# Altium PCB prog.PcbDoc
Units mil, origin at the board's own origin, x right, y up, seen from the top; angles counter-clockwise.
Board outline 400 x 1145 mil, 2 copper layers (Top Layer, Bottom Layer); 2 components, 7 nets, 20 pads, 1 vias.
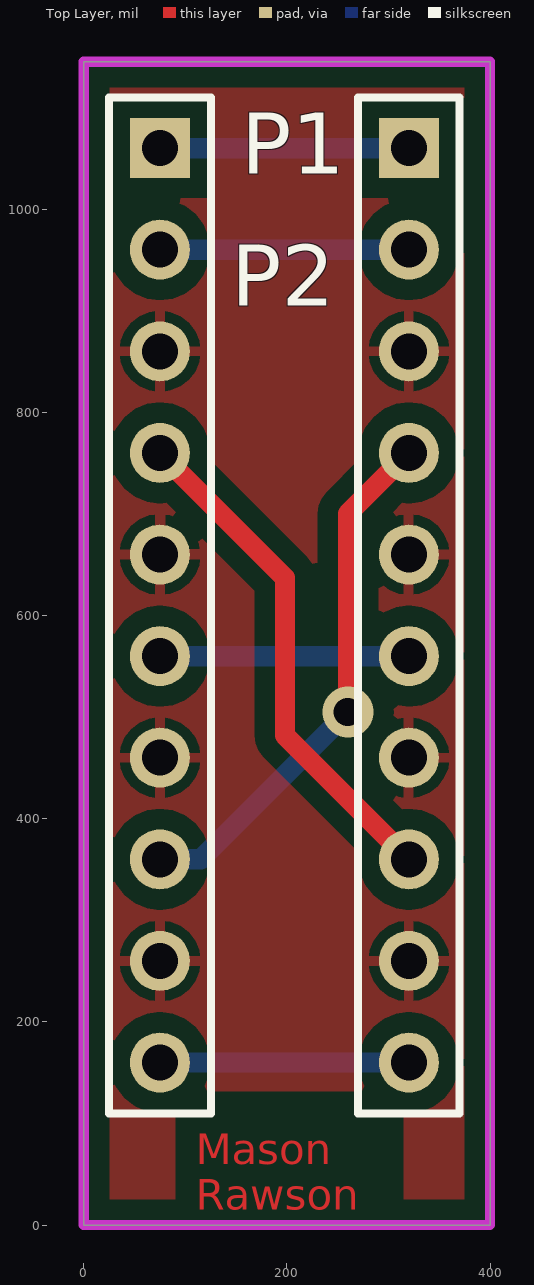
[diagram p0: Top Layer view]
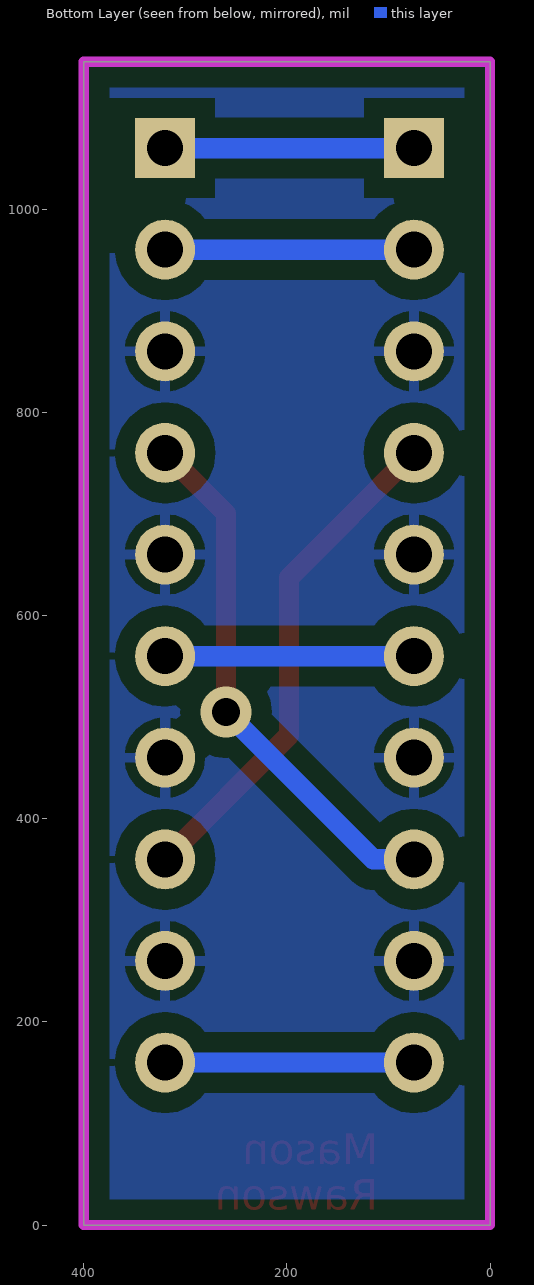
[diagram p1: Bottom Layer view, seen from below]

## Layer stack, top to bottom
Top Solder: solder mask 0.4, Solder Resist, Dk 3.5
Top Layer: signal copper 1.4
Dielectric 1: dielectric 12.6, FR-4, Dk 4.8
Bottom Layer: signal copper 1.4
Bottom Solder: solder mask 0.4, Solder Resist, Dk 3.5

## Board outline
0,0 0,1145 400,1145 400,0

## Design rules (kind name [scope] priority, off if disabled: settings)
Clearance [All] p1: gap=20
PolygonConnect [All] p1: connectstyle=Relief reliefconductorwidth=10 reliefentries=4 polygonreliefangle="90 Angle" airgapwidth=10
RoutingVias [All] p1: holewidth=28 width=50 viastyle="Through Hole" minholewidth=28 minwidth=50 maxholewidth=28 maxwidth=50
SolderMaskExpansion [All] p1: expansion=4
Width [All] p1: maxlimit=20 minlimit=20 preferedwidth=20
30 further rules are at their usual default settings.

## Components (designator, comment, footprint, x,y, rotation, side; value= is the part's Value field where it differs from the comment)
P1 "debugger" HDR1X10 75,1060 r270 top
P2 "board" HDR1X10 320,1060 r270 top

## Footprints (in the part's own frame and the unit in brackets; to place one, negate y for a bottom-side part, rotate by r counter-clockwise, add the part's x,y. Pads: shape width x height; smd on the part's side, far side on the other; paste and mask are expansions set on the pad)
HDR1X10 [mm] "Connector; Header; 10 Position"
  rect 1.5x1.5 hole 0.9: 1(0,0)
  round 1.5 hole 0.9: 2(2.54,0) 3(5.08,0) 4(7.62,0) 5(10.16,0) 6(12.7,0) 7(15.24,0) 8(17.78,0) 9(20.32,0) 10(22.86,0)
  silkscreen extent -1.27,-1.27 24.13,1.27

## Part data
P1 P2: library part "Header 10", "Header, 10-Pin"

## Via types
v1: diameter 50, hole 28, Top Layer to Bottom Layer, 1 vias

## Nets (pads, with @x,y where several pads share a name; then routed paths per layer and width w, separated by ;. In a path a pad name is that pad's centre, name@x,y a point inside that pad or via, vN(x,y) a via of type N, cw(c..) or ccw(c..) an arc to the next point about the centre after c; other vN are vias at no path point)
GND: P1.3 P1.5 P1.7 P1.9 P2.3 P2.5 P2.7 P2.9
RST_N: P1.10 P2.10 | length 245
  Bottom Layer w20: P1.10 P2.10
TCK: P1.4 P2.8 | length 501.5
  Top Layer w20: P1.4 198,637 198,482 P2.8
TDI: P1.8 P2.4 | length 524.9
  Top Layer w20: v1(260,505) 260,700 P2.4
  Bottom Layer w20: P1.8 115,360 v1(260,505)
TDO: P1.6 P2.6 | length 245
  Bottom Layer w20: P1.6 P2.6
TMS: P1.2 P2.2 | length 245
  Bottom Layer w20: P1.2 P2.2
VCC: P1.1 P2.1 | length 245
  Bottom Layer w20: P1.1 P2.1

## Polygon pours and split planes (outlines as drawn)
GND on Top Layer "top" (solid, pour order 0): 0,0 0,1145 400,1145 400,0
GND on Bottom Layer "bot" (solid, pour order 2): 0,0 0,1145 400,1145 400,0

## Keep-outs
Keep-Out Layer:
  the board outline again, w10

## Other copper
Top Layer:
  text "Mason / Rawson" at 110,15 h30